# Altium PCB Awtrix Finally.pcbdoc (part 1 of 4)
Units mil, origin at the board's own origin, x right, y up, seen from the top; angles counter-clockwise.
Board outline 8820 x 2812 mil, 2 copper layers (Top Layer, Bottom Layer); 513 components, 259 nets, 1543 pads, 743 vias.
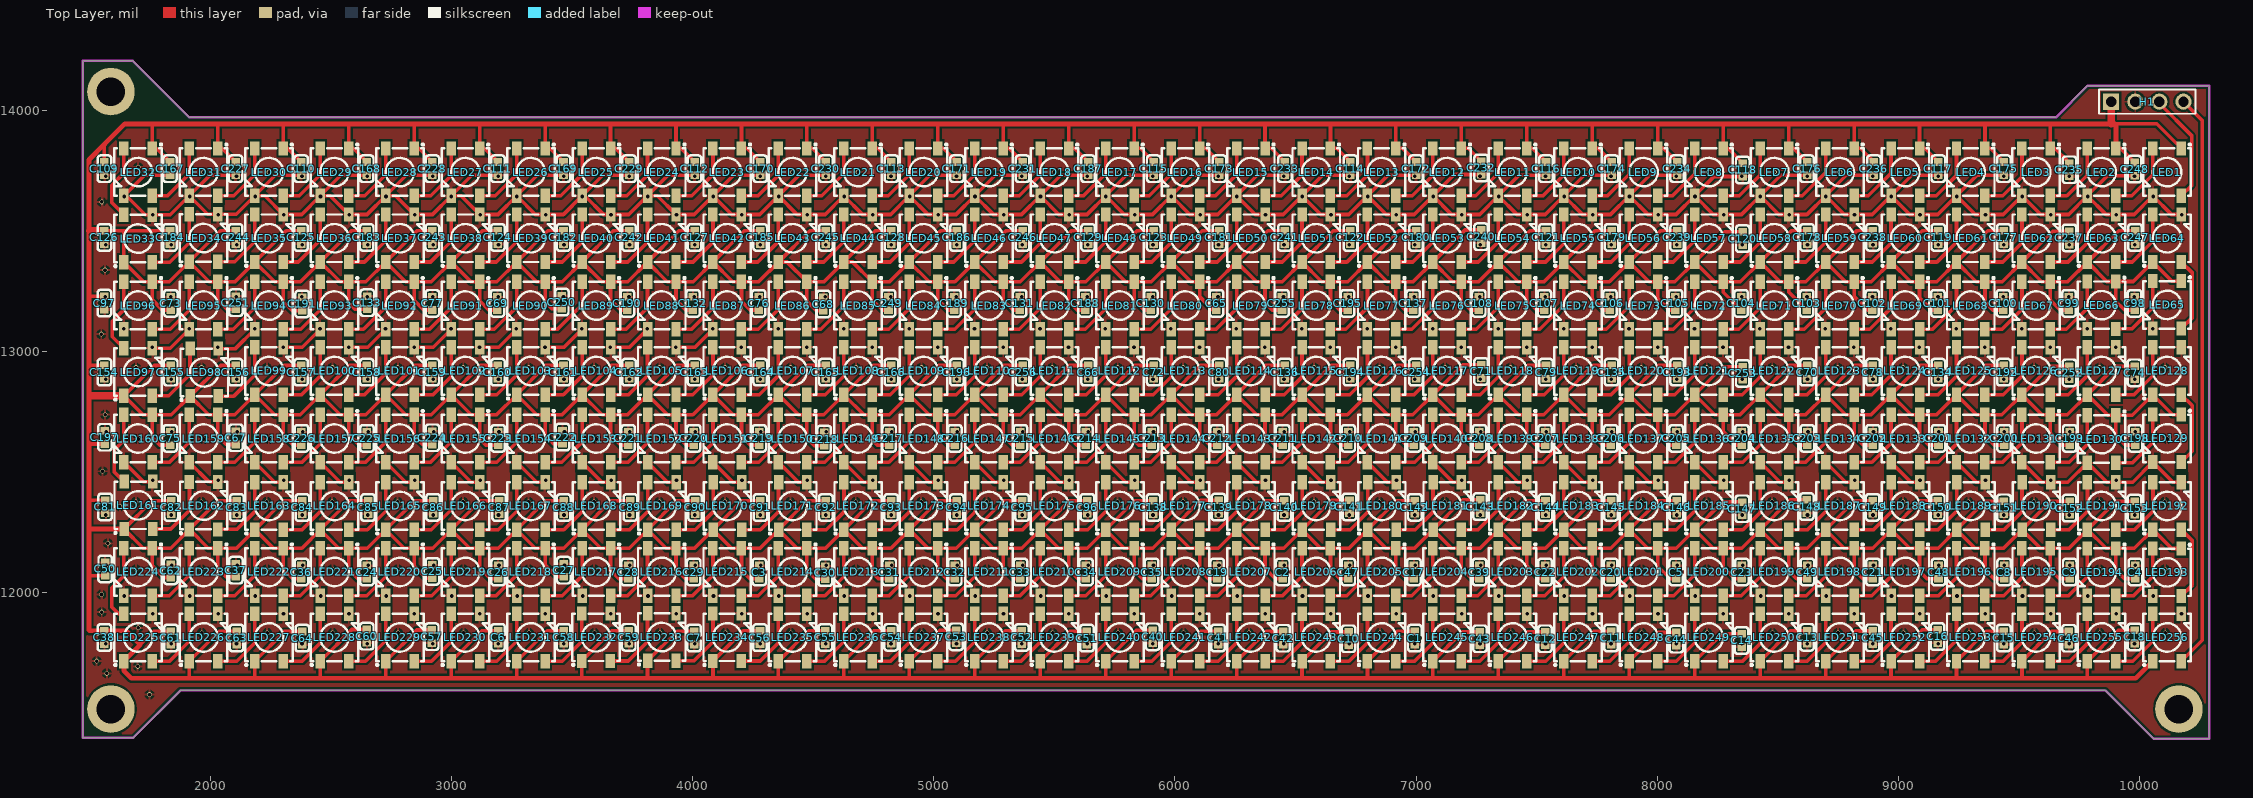
[diagram p0: Top Layer view]
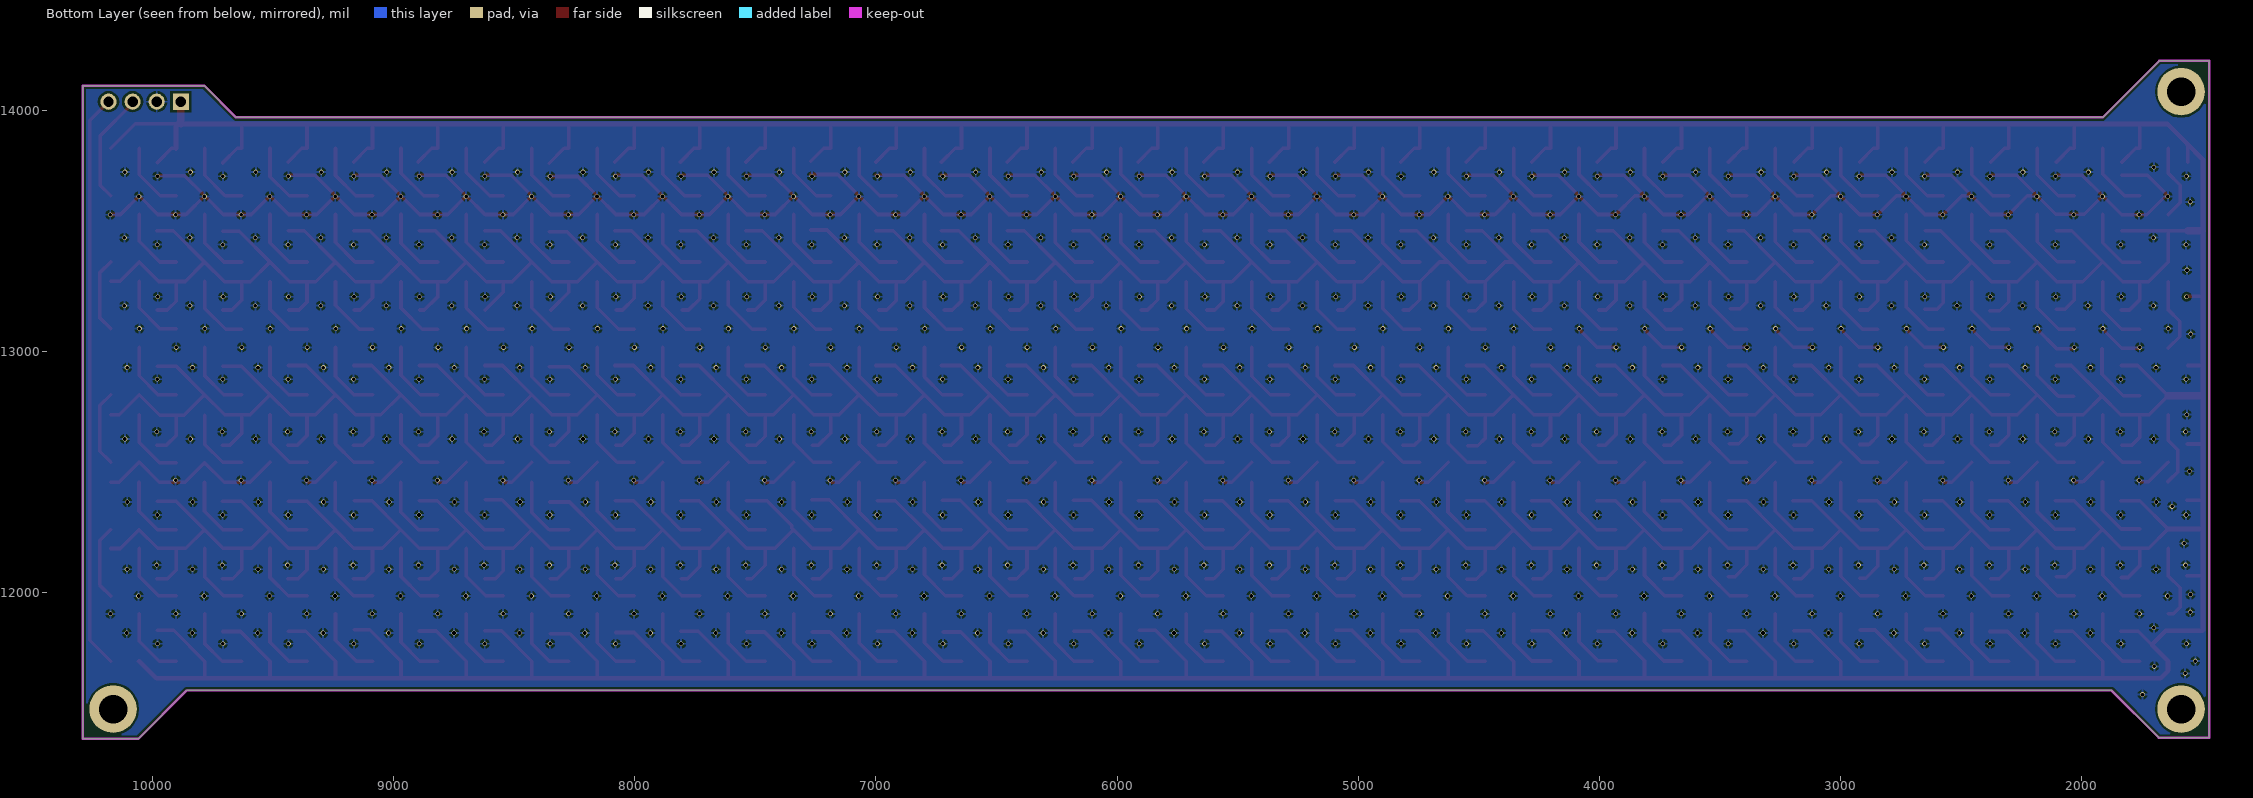
[diagram p1: Bottom Layer view, seen from below]

## Layer stack, top to bottom
Top Solder: solder mask 0.4, Solder Resist, Dk 3.5
Top Layer: signal copper 1.4
Dielectric1: dielectric 12.6, FR-4, Dk 4.8
Bottom Layer: signal copper 1.4
Bottom Solder: solder mask 0.4, Solder Resist, Dk 3.5

## Board outline
1470,11399 1470,14207 1677,14207 1912,13972 9654,13972 9786,14104 10290,14104 10290,11395 10059,11395 9859,11595 1875,11595 1679,11399

## Design rules (kind name [scope] priority, off if disabled: settings)
Clearance Clearance_3 [InNamedPolygon('Top Layer-No Net')] p1: gap=10 ignorepadtopadclearanceinfootprint=FALSE except(0: Arc-Hole Track-Hole SMDPad-Hole THPad-Hole Via-Hole Fill-Hole Poly-Hole Region-Hole Text-Hole)
Clearance Clearance_2 [InNamedPolygon('Top Layer-No Net')] p2: gap=10 ignorepadtopadclearanceinfootprint=FALSE except(0: Arc-Hole Track-Hole SMDPad-Hole THPad-Hole Via-Hole Fill-Hole Poly-Hole Region-Hole Text-Hole)
Clearance Clearance_1 [InNamedPolygon('Top Layer-No Net')] p3: gap=20 ignorepadtopadclearanceinfootprint=FALSE
Clearance [All] p4 off: gap=6 ignorepadtopadclearanceinfootprint=FALSE
DiffPairsRouting [All] p1: maxlimit=10 minlimit=10 mostfreqgap=10 toplayer_minwidth=15 toplayer_maxwidth=15 toplayer_prefwidth=15 bottomlayer_minwidth=15 bottomlayer_maxwidth=15 bottomlayer_prefwidth=15 substack1={9DCB3A66-A2ED-46C3-AF7E-1C9C7828DB16} toplayer_{9dcb3a66-a2ed-46c3-af7e-1c9c7828db16}_minwidth=15 toplayer_{9dcb3a66-a2ed-46c3-af7e-1c9c7828db16}_maxwidth=15 toplayer_{9dcb3a66-a2ed-46c3-af7e-1c9c7828db16}_prefwidth=15 bottomlayer_{9dcb3a66-a2ed-46c3-af7e-1c9c7828db16}_minwidth=15 bottomlayer_{9dcb3a66-a2ed-46c3-af7e-1c9c7828db16}_maxwidth=15 bottomlayer_{9dcb3a66-a2ed-46c3-af7e-1c9c7828db16}_prefwidth=15 substack2={7CB1ADBF-FCB9-4D81-AEE6-A38A94ABE13F} toplayer_{7cb1adbf-fcb9-4d81-aee6-a38a94abe13f}_minwidth=15 toplayer_{7cb1adbf-fcb9-4d81-aee6-a38a94abe13f}_maxwidth=15 toplayer_{7cb1adbf-fcb9-4d81-aee6-a38a94abe13f}_prefwidth=15 bottomlayer_{7cb1adbf-fcb9-4d81-aee6-a38a94abe13f}_minwidth=15 bottomlayer_{7cb1adbf-fcb9-4d81-aee6-a38a94abe13f}_maxwidth=15 bottomlayer_{7cb1adbf-fcb9-4d81-aee6-a38a94abe13f}_prefwidth=15 substack3={DA0BA345-2DA5-458A-ACEA-8A78981C34EA} toplayer_{da0ba345-2da5-458a-acea-8a78981c34ea}_minwidth=15 toplayer_{da0ba345-2da5-458a-acea-8a78981c34ea}_maxwidth=15 toplayer_{da0ba345-2da5-458a-acea-8a78981c34ea}_prefwidth=15 bottomlayer_{da0ba345-2da5-458a-acea-8a78981c34ea}_minwidth=15 bottomlayer_{da0ba345-2da5-458a-acea-8a78981c34ea}_maxwidth=15 bottomlayer_{da0ba345-2da5-458a-acea-8a78981c34ea}_prefwidth=15 substack4={AAEF50FA-F602-4D6B-89CB-EBC685EF44E8} toplayer_{aaef50fa-f602-4d6b-89cb-ebc685ef44e8}_minwidth=15 toplayer_{aaef50fa-f602-4d6b-89cb-ebc685ef44e8}_maxwidth=15 toplayer_{aaef50fa-f602-4d6b-89cb-ebc685ef44e8}_prefwidth=15 bottomlayer_{aaef50fa-f602-4d6b-89cb-ebc685ef44e8}_minwidth=15 bottomlayer_{aaef50fa-f602-4d6b-89cb-ebc685ef44e8}_maxwidth=15 bottomlayer_{aaef50fa-f602-4d6b-89cb-ebc685ef44e8}_prefwidth=15 maxuncoupledlength=500
HoleSize [All] p1: absolutevalues=TRUE maxlimit=10000 minlimit=1 maxpercent=80.000 minpercent=20.000
MinimumSolderMaskSliver [All] p1: minsoldermaskwidth=6
PolygonConnect [All] p1: connectstyle=Relief reliefconductorwidth=10 reliefentries=4 polygonreliefangle="90 Angle" airgapwidth=10
RoutingVias [All] p1: holewidth=12 width=22 viastyle="Through Hole" minholewidth=12 minwidth=22 maxholewidth=12 maxwidth=22
SilkToSilkClearance [All] p1: silktosilkclearance=0
SilkToSolderMaskClearance [IsPad] p1: minsilkscreentomaskgap=0 clearancetoexposedcopper=TRUE
SolderMaskExpansion [All] p1: expansion=4 istentingtop=FALSE
Width [All] p1: maxlimit=100 minlimit=10 preferedwidth=15 substack1={9DCB3A66-A2ED-46C3-AF7E-1C9C7828DB16} toplayer_{9dcb3a66-a2ed-46c3-af7e-1c9c7828db16}_maxwidth=50 bottomlayer_{9dcb3a66-a2ed-46c3-af7e-1c9c7828db16}_maxwidth=50 substack2={7CB1ADBF-FCB9-4D81-AEE6-A38A94ABE13F} toplayer_{7cb1adbf-fcb9-4d81-aee6-a38a94abe13f}_maxwidth=50 bottomlayer_{7cb1adbf-fcb9-4d81-aee6-a38a94abe13f}_maxwidth=50 substack3={DA0BA345-2DA5-458A-ACEA-8A78981C34EA} toplayer_{da0ba345-2da5-458a-acea-8a78981c34ea}_maxwidth=50 bottomlayer_{da0ba345-2da5-458a-acea-8a78981c34ea}_maxwidth=50 substack4={AAEF50FA-F602-4D6B-89CB-EBC685EF44E8} toplayer_{aaef50fa-f602-4d6b-89cb-ebc685ef44e8}_maxwidth=50 bottomlayer_{aaef50fa-f602-4d6b-89cb-ebc685ef44e8}_maxwidth=50
25 further rules are at their usual default settings.

## Components (designator, comment, footprint, x,y, rotation, side; value= is the part's Value field where it differs from the comment)
C1 "10uF" C0603 6995,11812.44 r90 top
C2 "10uF" C0603 6446.98,12086.26 r270 top
C3 "10uF" C0603 4275.97,12086.26 r270 top
C4 "10uF" C0603 9983,12086.26 r270 top
C5 "10uF" C0603 8078.99,12086.26 r270 top
C6 "10uF" C0603 3192.76,11815.61 r90 top
C7 "10uF" C0603 4005.75,11813.32 r90 top
C8 "10uF" C0603 9439,12086.26 r270 top
C9 "10uF" C0603 9711,12086.26 r270 top
C10 "10uF" C0603 6720,11810 r90 top
C11 "10uF" C0603 7809,11813 r90 top
C12 "10uF" C0603 7535,11810 r90 top
C13 "10uF" C0603 8622,11816 r90 top
C14 "10uF" C0603 8350,11802.56 r90 top
C15 "10uF" C0603 9438,11813 r90 top
C16 "10uF" C0603 9163,11819 r90 top
C17 "10uF" C0603 6990.98,12086.26 r270 top
C18 "10uF" C0603 9980,11817.44 r90 top
C19 "10uF" C0603 6174.98,12086.26 r270 top
C20 "10uF" C0603 7806.99,12086.26 r270 top
C21 "10uF" C0603 8894.99,12086.26 r270 top
C22 "10uF" C0603 7534.99,12086.26 r270 top
C23 "10uF" C0603 8350.99,12086.26 r270 top
C24 "10uF" C0603 2648.96,12086.26 r270 top
C25 "10uF" C0603 2920,12088.56 r270 top
C26 "10uF" C0603 3192.96,12086.26 r270 top
C27 "10uF" C0603 3465,12093.56 r270 top
C28 "10uF" C0603 3731.97,12086.26 r270 top
C29 "10uF" C0603 4003.97,12086.26 r270 top
C30 "10uF" C0603 4550,12083.44 r270 top
C31 "10uF" C0603 4814.97,12086.26 r270 top
C32 "10uF" C0603 5086.97,12086.26 r270 top
C33 "10uF" C0603 5358.97,12086.26 r270 top
C34 "10uF" C0603 5630.98,12086.26 r270 top
C35 "10uF" C0603 5902.98,12086.26 r270 top
C36 "10uF" C0603 2376.96,12086.26 r270 top
C37 "10uF" C0603 2105,12093.56 r270 top
C38 "10uF" C0603 1560,11815 r90 top
C39 "10uF" C0603 7262.98,12086.26 r270 top
C40 "10uF" C0603 5908,11818 r90 top
C41 "10uF" C0603 6179,11813 r90 top
C42 "10uF" C0603 6449,11812 r90 top
C43 "10uF" C0603 7265,11810 r90 top
C44 "10uF" C0603 8080,11808 r90 top
C45 "10uF" C0603 8894,11814 r90 top
C46 "10uF" C0603 9708,11812 r90 top
C47 "10uF" C0603 6718.98,12086.26 r270 top
C48 "10uF" C0603 9166.99,12086.26 r270 top
C49 "10uF" C0603 8622.99,12086.26 r270 top
C50 "10uF" C0603 1563,12099 r270 top
C51 "10uF" C0603 5635,11812.44 r90 top
C52 "10uF" C0603 5365,11815 r90 top
C53 "10uF" C0603 5093,11818 r90 top
C54 "10uF" C0603 4823,11816 r90 top
C55 "10uF" C0603 4550,11815 r90 top
C56 "10uF" C0603 4279,11814.44 r90 top
C57 "10uF" C0603 2917.75,11818.32 r90 top
C58 "10uF" C0603 3464.76,11815.61 r90 top
C59 "10uF" C0603 3735,11816 r90 top
C60 "10uF" C0603 2648,11820.44 r90 top
C61 "10uF" C0603 1836,11813 r90 top
C62 "10uF" C0603 1835,12091 r270 top
C63 "10uF" C0603 2108,11813 r90 top
C64 "10uF" C0603 2381,11812.3 r90 top
C65 "10uF" C0603 6171.98,13200.44 r270 top
C66 "10uF" C0603 5640.02,12915.56 r90 top
C67 "10uF" C0603 2105,12642.96 r270 top
C68 "10uF" C0603 4542,13197.41 r270 top
C69 "10uF" C0603 3189.97,13200.44 r270 top
C70 "10uF" C0603 8622.04,12915.56 r90 top
C71 "10uF" C0603 7270,12918.59 r90 top
C72 "10uF" C0603 5912.02,12915.56 r90 top
C73 "10uF" C0603 1835,13200.44 r270 top
C74 "10uF" C0603 9980,12913 r90 top
C75 "10uF" C0603 1832.96,12640.41 r270 top
C76 "10uF" C0603 4272.97,13200.44 r270 top
C77 "10uF" C0603 2920,13200.56 r270 top
C78 "10uF" C0603 8895,12915.56 r90 top
C79 "10uF" C0603 7539.03,12915.56 r90 top
C80 "10uF" C0603 6184.02,12915.56 r90 top
C81 "10uF" C0603 1563,12357 r90 top
C82 "10uF" C0603 1837.4,12354.09 r90 top
C83 "10uF" C0603 2109.4,12354.09 r90 top
C84 "10uF" C0603 2381.41,12354.09 r90 top
C85 "10uF" C0603 2653.41,12354.09 r90 top
C86 "10uF" C0603 2923,12355 r90 top
C87 "10uF" C0603 3197.41,12354.09 r90 top
C88 "10uF" C0603 3465,12354 r90 top
C89 "10uF" C0603 3741.41,12354.09 r90 top
C90 "10uF" C0603 4010,12354 r90 top
C91 "10uF" C0603 4281,12354 r90 top
C92 "10uF" C0603 4552,12354 r90 top
C93 "10uF" C0603 4823,12354 r90 top
C94 "10uF" C0603 5095,12354 r90 top
C95 "10uF" C0603 5366,12354 r90 top
C96 "10uF" C0603 5637,12355 r90 top
C97 "10uF" C0603 1560,13202 r90 top
C98 "10uF" C0603 9980,13200.44 r270 top
C99 "10uF" C0603 9708,13200.44 r270 top
C100 "10uF" C0603 9436,13200.44 r270 top
C101 "10uF" C0603 9164,13200.44 r270 top
C102 "10uF" C0603 8891.99,13200.44 r270 top
C103 "10uF" C0603 8619.99,13200.44 r270 top
C104 "10uF" C0603 8347.99,13200.44 r270 top
C105 "10uF" C0603 8075.99,13200.44 r270 top
C106 "10uF" C0603 7803.99,13200.44 r270 top
C107 "10uF" C0603 7531.99,13200.44 r270 top
C108 "10uF" C0603 7259.99,13200.44 r270 top
C109 "10uF" C0603 1560,13759.41 r90 top
C110 "10uF" C0603 2376,13759.41 r90 top
C111 "10uF" C0603 3192.01,13759.41 r90 top
C112 "10uF" C0603 4008.01,13759.41 r90 top
C113 "10uF" C0603 4824.02,13759.41 r90 top
C114 "10uF" C0603 6728.03,13759.41 r90 top
C115 "10uF" C0603 5912.02,13759.41 r90 top
C116 "10uF" C0603 7539.03,13759.41 r90 top
C117 "10uF" C0603 9166.04,13759.41 r90 top
C118 "10uF" C0603 8355.03,13754.41 r90 top
C119 "10uF" C0603 9166.04,13474.41 r90 top
C120 "10uF" C0603 8355.03,13469.41 r90 top
C121 "10uF" C0603 7539.03,13474.41 r90 top
C122 "10uF" C0603 6728.03,13474.41 r90 top
C123 "10uF" C0603 5912.02,13474.41 r90 top
C124 "10uF" C0603 3192.01,13474.41 r90 top
C125 "10uF" C0603 2376,13474.41 r90 top
C126 "10uF" C0603 1560,13474.41 r90 top
C127 "10uF" C0603 4008.01,13474.41 r90 top
C128 "10uF" C0603 4824.02,13474.41 r90 top
C129 "10uF" C0603 5640.02,13474.41 r90 top
C130 "10uF" C0603 5899.98,13200.44 r270 top
C131 "10uF" C0603 5355.98,13200.44 r270 top
C132 "10uF" C0603 4000.97,13200.44 r270 top
C133 "10uF" C0603 2650,13203 r270 top
C134 "10uF" C0603 9166.04,12915.56 r90 top
C135 "10uF" C0603 7811.03,12915.56 r90 top
C136 "10uF" C0603 6456.03,12915.56 r90 top
C137 "10uF" C0603 6987.98,13200.44 r270 top
C138 "10uF" C0603 5911,12354 r90 top
C139 "10uF" C0603 6181,12356 r90 top
C140 "10uF" C0603 6454,12354 r90 top
C141 "10uF" C0603 6724,12357 r90 top
C142 "10uF" C0603 6995,12355 r90 top
C143 "10uF" C0603 7266,12358 r90 top
C144 "10uF" C0603 7537,12354 r90 top
C145 "10uF" C0603 7809,12355 r90 top
C146 "10uF" C0603 8081,12355 r90 top
C147 "10uF" C0603 8353,12349 r90 top
C148 "10uF" C0603 8621,12358 r90 top
C149 "10uF" C0603 8894,12355 r90 top
C150 "10uF" C0603 9164,12354 r90 top
C151 "10uF" C0603 9438.04,12353 r90 top
C152 "10uF" C0603 9710.4,12351.65 r90 top
C153 "10uF" C0603 9980.4,12351.65 r90 top
C154 "10uF" C0603 1560,12915.56 r90 top
C155 "10uF" C0603 1835,12915.44 r90 top
C156 "10uF" C0603 2104,12915.56 r90 top
C157 "10uF" C0603 2376,12915.56 r90 top
C158 "10uF" C0603 2648.01,12915.56 r90 top
C159 "10uF" C0603 2920.01,12915.56 r90 top
C160 "10uF" C0603 3192.01,12915.56 r90 top
C161 "10uF" C0603 3464.01,12915.56 r90 top
C162 "10uF" C0603 3736.01,12915.56 r90 top
C163 "10uF" C0603 4008.01,12915.56 r90 top
C164 "10uF" C0603 4280.01,12915.56 r90 top
C165 "10uF" C0603 4552.02,12915.56 r90 top
C166 "10uF" C0603 4824.02,12915.56 r90 top
C167 "10uF" C0603 1832,13759.41 r90 top
C168 "10uF" C0603 2648.01,13759.41 r90 top
C169 "10uF" C0603 3464.01,13759.41 r90 top
C170 "10uF" C0603 4280.01,13759.41 r90 top
C171 "10uF" C0603 5096.02,13759.41 r90 top
C172 "10uF" C0603 7000.03,13759.41 r90 top
C173 "10uF" C0603 6184.02,13759.41 r90 top
C174 "10uF" C0603 7811.03,13759.41 r90 top
C175 "10uF" C0603 9438.04,13759.41 r90 top
C176 "10uF" C0603 8622.04,13759.41 r90 top
C177 "10uF" C0603 9438.04,13474.41 r90 top
C178 "10uF" C0603 8622.04,13474.41 r90 top
C179 "10uF" C0603 7811.03,13474.41 r90 top
C180 "10uF" C0603 7000.03,13474.41 r90 top
C181 "10uF" C0603 6184.02,13474.41 r90 top
C182 "10uF" C0603 3464.01,13474.41 r90 top
C183 "10uF" C0603 2648.01,13474.41 r90 top
C184 "10uF" C0603 1832,13474.41 r90 top
C185 "10uF" C0603 4280.01,13474.41 r90 top
C186 "10uF" C0603 5096.02,13474.41 r90 top
C187 "10uF" C0603 5640.02,13759.41 r90 top
C188 "10uF" C0603 5627.98,13200.44 r270 top
C189 "10uF" C0603 5083.97,13200.44 r270 top
C190 "10uF" C0603 3728.97,13200.44 r270 top
C191 "10uF" C0603 2380,13198 r270 top
C192 "10uF" C0603 9438.04,12915.56 r90 top
C193 "10uF" C0603 8083.03,12915.56 r90 top
C194 "10uF" C0603 6728.03,12915.56 r90 top
C195 "10uF" C0603 6715.98,13200.44 r270 top
C196 "10uF" C0603 5096.02,12915.56 r90 top
C197 "10uF" C0603 1562,12645 r270 top
C198 "10uF" C0603 9983,12640.41 r270 top
C199 "10uF" C0603 9711,12640.41 r270 top
C200 "10uF" C0603 9439,12640.41 r270 top
C201 "10uF" C0603 9166.99,12640.41 r270 top
C202 "10uF" C0603 8894.99,12640.41 r270 top
C203 "10uF" C0603 8622.99,12640.41 r270 top
C204 "10uF" C0603 8350.99,12640.41 r270 top
C205 "10uF" C0603 8078.99,12640.41 r270 top
C206 "10uF" C0603 7806.99,12640.41 r270 top
C207 "10uF" C0603 7534.99,12640.41 r270 top
C208 "10uF" C0603 7262.98,12640.41 r270 top
C209 "10uF" C0603 6990.98,12640.41 r270 top
C210 "10uF" C0603 6718.98,12640.41 r270 top
C211 "10uF" C0603 6446.98,12640.41 r270 top
C212 "10uF" C0603 6174.98,12640.41 r270 top
C213 "10uF" C0603 5902.98,12640.41 r270 top
C214 "10uF" C0603 5630.98,12640.41 r270 top
C215 "10uF" C0603 5358.97,12640.41 r270 top
C216 "10uF" C0603 5086.97,12640.41 r270 top
C217 "10uF" C0603 4814.97,12640.41 r270 top
C218 "10uF" C0603 4545,12637.37 r270 top
C219 "10uF" C0603 4275.97,12640.41 r270 top
C220 "10uF" C0603 4003.97,12640.41 r270 top
C221 "10uF" C0603 3731.97,12640.41 r270 top
C222 "10uF" C0603 3459.97,12645.41 r270 top
C223 "10uF" C0603 3192.96,12640.41 r270 top
C224 "10uF" C0603 2920,12642.96 r270 top
C225 "10uF" C0603 2648.96,12640.41 r270 top
C226 "10uF" C0603 2376.96,12640.41 r270 top
C227 "10uF" C0603 2104,13759.41 r90 top
C228 "10uF" C0603 2920.01,13759.41 r90 top
C229 "10uF" C0603 3736.01,13759.41 r90 top
C230 "10uF" C0603 4552.02,13759.41 r90 top
C231 "10uF" C0603 5368.02,13759.41 r90 top
C232 "10uF" C0603 7270,13762.44 r90 top
C233 "10uF" C0603 6456.03,13759.41 r90 top
C234 "10uF" C0603 8083.03,13759.41 r90 top
C235 "10uF" C0603 9710,13755 r90 top
C236 "10uF" C0603 8899.04,13759.41 r90 top
C237 "10uF" C0603 9710,13472.44 r90 top
C238 "10uF" C0603 8895,13475 r90 top
C239 "10uF" C0603 8083.03,13474.41 r90 top
C240 "10uF" C0603 7270,13477.44 r90 top
C241 "10uF" C0603 6456.03,13474.41 r90 top
C242 "10uF" C0603 3736.01,13474.41 r90 top
C243 "10uF" C0603 2920.01,13474.41 r90 top
C244 "10uF" C0603 2104,13474.41 r90 top
C245 "10uF" C0603 4552.02,13474.41 r90 top
C246 "10uF" C0603 5368.02,13474.41 r90 top
C247 "10uF" C0603 9982.04,13474.41 r90 top
C248 "10uF" C0603 9980,13757.44 r90 top
C249 "10uF" C0603 4811.97,13200.44 r270 top
C250 "10uF" C0603 3456.97,13205.44 r270 top
C251 "10uF" C0603 2105,13203 r270 top
C252 "10uF" C0603 9710,12913 r90 top
C253 "10uF" C0603 8355.03,12910.56 r90 top
C254 "10uF" C0603 7000.03,12915.56 r90 top
C255 "10uF" C0603 6443.98,13200.44 r270 top
C256 "10uF" C0603 5368.02,12915.56 r90 top
H1 "220S-1*4P H=8.5MM Ytype Gold-plated" HDR-TH_4P-P2.54-V 10033,14037 r0 top
LED1 "WS2812B" LED-SMD_4P-L5.0-W5.0-TL 10114.99,13745 r270 top
LED2 "WS2812B" LED-SMD_4P-L5.0-W5.0-TL 9843.54,13745 r270 top
LED3 "WS2812B" LED-SMD_4P-L5.0-W5.0-TL 9572.09,13745 r270 top
LED4 "WS2812B" LED-SMD_4P-L5.0-W5.0-TL 9300.64,13745 r270 top
LED5 "WS2812B" LED-SMD_4P-L5.0-W5.0-TL 9029.18,13745 r270 top
LED6 "WS2812B" LED-SMD_4P-L5.0-W5.0-TL 8757.73,13745 r270 top
LED7 "WS2812B" LED-SMD_4P-L5.0-W5.0-TL 8486.28,13745 r270 top
LED8 "WS2812B" LED-SMD_4P-L5.0-W5.0-TL 8214.83,13745 r270 top
LED9 "WS2812B" LED-SMD_4P-L5.0-W5.0-TL 7943.38,13745 r270 top
LED10 "WS2812B" LED-SMD_4P-L5.0-W5.0-TL 7671.93,13745 r270 top
LED11 "WS2812B" LED-SMD_4P-L5.0-W5.0-TL 7400.47,13745 r270 top
LED12 "WS2812B" LED-SMD_4P-L5.0-W5.0-TL 7129.02,13745 r270 top
LED13 "WS2812B" LED-SMD_4P-L5.0-W5.0-TL 6857.57,13745 r270 top
LED14 "WS2812B" LED-SMD_4P-L5.0-W5.0-TL 6586.12,13745 r270 top
LED15 "WS2812B" LED-SMD_4P-L5.0-W5.0-TL 6314.67,13745 r270 top
LED16 "WS2812B" LED-SMD_4P-L5.0-W5.0-TL 6043.22,13745 r270 top
LED17 "WS2812B" LED-SMD_4P-L5.0-W5.0-TL 5771.77,13745 r270 top
LED18 "WS2812B" LED-SMD_4P-L5.0-W5.0-TL 5500.31,13745 r270 top
LED19 "WS2812B" LED-SMD_4P-L5.0-W5.0-TL 5228.86,13745 r270 top
LED20 "WS2812B" LED-SMD_4P-L5.0-W5.0-TL 4957.41,13745 r270 top
LED21 "WS2812B" LED-SMD_4P-L5.0-W5.0-TL 4685.96,13745 r270 top
LED22 "WS2812B" LED-SMD_4P-L5.0-W5.0-TL 4414.51,13745 r270 top
LED23 "WS2812B" LED-SMD_4P-L5.0-W5.0-TL 4143.06,13745 r270 top
LED24 "WS2812B" LED-SMD_4P-L5.0-W5.0-TL 3871.61,13745 r270 top
LED25 "WS2812B" LED-SMD_4P-L5.0-W5.0-TL 3600.15,13745 r270 top
LED26 "WS2812B" LED-SMD_4P-L5.0-W5.0-TL 3328.7,13745 r270 top
LED27 "WS2812B" LED-SMD_4P-L5.0-W5.0-TL 3057.25,13745 r270 top
LED28 "WS2812B" LED-SMD_4P-L5.0-W5.0-TL 2785.8,13745 r270 top
LED29 "WS2812B" LED-SMD_4P-L5.0-W5.0-TL 2514.35,13745 r270 top
LED30 "WS2812B" LED-SMD_4P-L5.0-W5.0-TL 2242.9,13745 r270 top
LED31 "WS2812B" LED-SMD_4P-L5.0-W5.0-TL 1971.44,13745 r270 top
LED32 "WS2812B" LED-SMD_4P-L5.0-W5.0-TL 1699.99,13745 r270 top
LED33 "WS2812B" LED-SMD_4P-L5.0-W5.0-TL 1700,13469.29 r90 top
LED34 "WS2812B" LED-SMD_4P-L5.0-W5.0-TL 1970.95,13471.58 r90 top
LED35 "WS2812B" LED-SMD_4P-L5.0-W5.0-TL 2242.9,13470.72 r90 top
LED36 "WS2812B" LED-SMD_4P-L5.0-W5.0-TL 2514.35,13470.72 r90 top
LED37 "WS2812B" LED-SMD_4P-L5.0-W5.0-TL 2785.81,13470.72 r90 top
LED38 "WS2812B" LED-SMD_4P-L5.0-W5.0-TL 3057.26,13470.72 r90 top
LED39 "WS2812B" LED-SMD_4P-L5.0-W5.0-TL 3328.71,13470.72 r90 top
LED40 "WS2812B" LED-SMD_4P-L5.0-W5.0-TL 3600.16,13470.72 r90 top
LED41 "WS2812B" LED-SMD_4P-L5.0-W5.0-TL 3871.61,13470.72 r90 top
LED42 "WS2812B" LED-SMD_4P-L5.0-W5.0-TL 4143.06,13470.72 r90 top
LED43 "WS2812B" LED-SMD_4P-L5.0-W5.0-TL 4414.52,13470.72 r90 top
LED44 "WS2812B" LED-SMD_4P-L5.0-W5.0-TL 4685.97,13470.72 r90 top
LED45 "WS2812B" LED-SMD_4P-L5.0-W5.0-TL 4957.42,13470.72 r90 top
LED46 "WS2812B" LED-SMD_4P-L5.0-W5.0-TL 5228.87,13470.72 r90 top
LED47 "WS2812B" LED-SMD_4P-L5.0-W5.0-TL 5500.32,13470.72 r90 top
LED48 "WS2812B" LED-SMD_4P-L5.0-W5.0-TL 5771.77,13470.72 r90 top
LED49 "WS2812B" LED-SMD_4P-L5.0-W5.0-TL 6043.22,13470.72 r90 top
LED50 "WS2812B" LED-SMD_4P-L5.0-W5.0-TL 6314.68,13470.72 r90 top
LED51 "WS2812B" LED-SMD_4P-L5.0-W5.0-TL 6586.13,13470.72 r90 top
LED52 "WS2812B" LED-SMD_4P-L5.0-W5.0-TL 6857.58,13470.72 r90 top
LED53 "WS2812B" LED-SMD_4P-L5.0-W5.0-TL 7129.03,13470.72 r90 top
LED54 "WS2812B" LED-SMD_4P-L5.0-W5.0-TL 7400.48,13470.72 r90 top
LED55 "WS2812B" LED-SMD_4P-L5.0-W5.0-TL 7671.93,13470.72 r90 top
LED56 "WS2812B" LED-SMD_4P-L5.0-W5.0-TL 7943.38,13470.72 r90 top
LED57 "WS2812B" LED-SMD_4P-L5.0-W5.0-TL 8214.84,13470.72 r90 top
LED58 "WS2812B" LED-SMD_4P-L5.0-W5.0-TL 8486.29,13470.72 r90 top
LED59 "WS2812B" LED-SMD_4P-L5.0-W5.0-TL 8757.74,13470.72 r90 top
LED60 "WS2812B" LED-SMD_4P-L5.0-W5.0-TL 9029.19,13470.72 r90 top
LED61 "WS2812B" LED-SMD_4P-L5.0-W5.0-TL 9300.64,13470.72 r90 top
LED62 "WS2812B" LED-SMD_4P-L5.0-W5.0-TL 9572.09,13470.72 r90 top
LED63 "WS2812B" LED-SMD_4P-L5.0-W5.0-TL 9843.55,13470.72 r90 top
LED64 "WS2812B" LED-SMD_4P-L5.0-W5.0-TL 10115,13470.72 r90 top
LED65 "WS2812B" LED-SMD_4P-L5.0-W5.0-TL 10115,13194.43 r270 top
LED66 "WS2812B" LED-SMD_4P-L5.0-W5.0-TL 9843.55,13193 r270 top
LED67 "WS2812B" LED-SMD_4P-L5.0-W5.0-TL 9572.1,13191.57 r270 top
LED68 "WS2812B" LED-SMD_4P-L5.0-W5.0-TL 9300.65,13191.57 r270 top
LED69 "WS2812B" LED-SMD_4P-L5.0-W5.0-TL 9029.19,13191.57 r270 top
LED70 "WS2812B" LED-SMD_4P-L5.0-W5.0-TL 8757.74,13191.57 r270 top
LED71 "WS2812B" LED-SMD_4P-L5.0-W5.0-TL 8486.29,13191.57 r270 top
LED72 "WS2812B" LED-SMD_4P-L5.0-W5.0-TL 8214.84,13191.57 r270 top
LED73 "WS2812B" LED-SMD_4P-L5.0-W5.0-TL 7943.39,13191.57 r270 top
LED74 "WS2812B" LED-SMD_4P-L5.0-W5.0-TL 7671.94,13191.57 r270 top
LED75 "WS2812B" LED-SMD_4P-L5.0-W5.0-TL 7400.48,13191.57 r270 top
LED76 "WS2812B" LED-SMD_4P-L5.0-W5.0-TL 7129.03,13191.57 r270 top
LED77 "WS2812B" LED-SMD_4P-L5.0-W5.0-TL 6857.58,13191.57 r270 top
LED78 "WS2812B" LED-SMD_4P-L5.0-W5.0-TL 6586.13,13191.57 r270 top
LED79 "WS2812B" LED-SMD_4P-L5.0-W5.0-TL 6314.68,13191.57 r270 top
LED80 "WS2812B" LED-SMD_4P-L5.0-W5.0-TL 6043.23,13191.57 r270 top
LED81 "WS2812B" LED-SMD_4P-L5.0-W5.0-TL 5771.78,13191.57 r270 top
LED82 "WS2812B" LED-SMD_4P-L5.0-W5.0-TL 5500.32,13191.57 r270 top
LED83 "WS2812B" LED-SMD_4P-L5.0-W5.0-TL 5228.87,13191.57 r270 top
LED84 "WS2812B" LED-SMD_4P-L5.0-W5.0-TL 4957.42,13191.57 r270 top
LED85 "WS2812B" LED-SMD_4P-L5.0-W5.0-TL 4685.97,13191.57 r270 top
LED86 "WS2812B" LED-SMD_4P-L5.0-W5.0-TL 4414.52,13191.57 r270 top
LED87 "WS2812B" LED-SMD_4P-L5.0-W5.0-TL 4143.07,13191.57 r270 top
LED88 "WS2812B" LED-SMD_4P-L5.0-W5.0-TL 3871.62,13191.57 r270 top
LED89 "WS2812B" LED-SMD_4P-L5.0-W5.0-TL 3600.16,13191.57 r270 top
LED90 "WS2812B" LED-SMD_4P-L5.0-W5.0-TL 3328.71,13191.57 r270 top
LED91 "WS2812B" LED-SMD_4P-L5.0-W5.0-TL 3057.26,13191.57 r270 top
LED92 "WS2812B" LED-SMD_4P-L5.0-W5.0-TL 2785.81,13191.57 r270 top
LED93 "WS2812B" LED-SMD_4P-L5.0-W5.0-TL 2514.36,13191.57 r270 top
LED94 "WS2812B" LED-SMD_4P-L5.0-W5.0-TL 2242.91,13191.57 r270 top
LED95 "WS2812B" LED-SMD_4P-L5.0-W5.0-TL 1971.45,13191.57 r270 top
LED96 "WS2812B" LED-SMD_4P-L5.0-W5.0-TL 1700,13191.57 r270 top
LED97 "WS2812B" LED-SMD_4P-L5.0-W5.0-TL 1700,12915.86 r90 top
LED98 "WS2812B" LED-SMD_4P-L5.0-W5.0-TL 1974.05,12914.58 r90 top
LED99 "WS2812B" LED-SMD_4P-L5.0-W5.0-TL 2242.9,12920.14 r90 top
LED100 "WS2812B" LED-SMD_4P-L5.0-W5.0-TL 2514.35,12920.14 r90 top
LED101 "WS2812B" LED-SMD_4P-L5.0-W5.0-TL 2785.81,12920.14 r90 top
LED102 "WS2812B" LED-SMD_4P-L5.0-W5.0-TL 3057.26,12920.14 r90 top
LED103 "WS2812B" LED-SMD_4P-L5.0-W5.0-TL 3328.71,12920.14 r90 top
LED104 "WS2812B" LED-SMD_4P-L5.0-W5.0-TL 3600.16,12920.14 r90 top
LED105 "WS2812B" LED-SMD_4P-L5.0-W5.0-TL 3871.61,12920.14 r90 top
LED106 "WS2812B" LED-SMD_4P-L5.0-W5.0-TL 4143.06,12920.14 r90 top
LED107 "WS2812B" LED-SMD_4P-L5.0-W5.0-TL 4414.52,12920.14 r90 top
LED108 "WS2812B" LED-SMD_4P-L5.0-W5.0-TL 4685.97,12920.14 r90 top
LED109 "WS2812B" LED-SMD_4P-L5.0-W5.0-TL 4957.42,12920.14 r90 top
LED110 "WS2812B" LED-SMD_4P-L5.0-W5.0-TL 5228.87,12920.14 r90 top
LED111 "WS2812B" LED-SMD_4P-L5.0-W5.0-TL 5500.32,12920.14 r90 top
LED112 "WS2812B" LED-SMD_4P-L5.0-W5.0-TL 5771.77,12920.14 r90 top
LED113 "WS2812B" LED-SMD_4P-L5.0-W5.0-TL 6043.22,12920.14 r90 top
LED114 "WS2812B" LED-SMD_4P-L5.0-W5.0-TL 6314.68,12920.14 r90 top
LED115 "WS2812B" LED-SMD_4P-L5.0-W5.0-TL 6586.13,12920.14 r90 top
LED116 "WS2812B" LED-SMD_4P-L5.0-W5.0-TL 6857.58,12920.14 r90 top
LED117 "WS2812B" LED-SMD_4P-L5.0-W5.0-TL 7129.03,12920.14 r90 top
LED118 "WS2812B" LED-SMD_4P-L5.0-W5.0-TL 7400.48,12920.14 r90 top
LED119 "WS2812B" LED-SMD_4P-L5.0-W5.0-TL 7671.93,12920.14 r90 top
LED120 "WS2812B" LED-SMD_4P-L5.0-W5.0-TL 7943.38,12920.14 r90 top
LED121 "WS2812B" LED-SMD_4P-L5.0-W5.0-TL 8214.84,12920.14 r90 top
LED122 "WS2812B" LED-SMD_4P-L5.0-W5.0-TL 8486.29,12920.14 r90 top
LED123 "WS2812B" LED-SMD_4P-L5.0-W5.0-TL 8757.74,12920.14 r90 top
LED124 "WS2812B" LED-SMD_4P-L5.0-W5.0-TL 9029.19,12920.14 r90 top
LED125 "WS2812B" LED-SMD_4P-L5.0-W5.0-TL 9300.64,12920.14 r90 top
LED126 "WS2812B" LED-SMD_4P-L5.0-W5.0-TL 9572.09,12920.14 r90 top
LED127 "WS2812B" LED-SMD_4P-L5.0-W5.0-TL 9843.55,12920.14 r90 top
LED128 "WS2812B" LED-SMD_4P-L5.0-W5.0-TL 10115,12920.14 r90 top
LED129 "WS2812B" LED-SMD_4P-L5.0-W5.0-TL 10115,12640.82 r270 top
LED130 "WS2812B" LED-SMD_4P-L5.0-W5.0-TL 9843.55,12637.96 r270 top
LED131 "WS2812B" LED-SMD_4P-L5.0-W5.0-TL 9572.1,12640.11 r270 top
LED132 "WS2812B" LED-SMD_4P-L5.0-W5.0-TL 9300.65,12640.11 r270 top
LED133 "WS2812B" LED-SMD_4P-L5.0-W5.0-TL 9029.19,12640.11 r270 top
LED134 "WS2812B" LED-SMD_4P-L5.0-W5.0-TL 8757.74,12640.11 r270 top
LED135 "WS2812B" LED-SMD_4P-L5.0-W5.0-TL 8486.29,12640.11 r270 top
LED136 "WS2812B" LED-SMD_4P-L5.0-W5.0-TL 8214.84,12640.11 r270 top
LED137 "WS2812B" LED-SMD_4P-L5.0-W5.0-TL 7943.39,12640.11 r270 top
LED138 "WS2812B" LED-SMD_4P-L5.0-W5.0-TL 7671.94,12640.11 r270 top
LED139 "WS2812B" LED-SMD_4P-L5.0-W5.0-TL 7400.48,12640.11 r270 top
LED140 "WS2812B" LED-SMD_4P-L5.0-W5.0-TL 7129.03,12640.11 r270 top
LED141 "WS2812B" LED-SMD_4P-L5.0-W5.0-TL 6857.58,12640.11 r270 top
LED142 "WS2812B" LED-SMD_4P-L5.0-W5.0-TL 6586.13,12640.11 r270 top
LED143 "WS2812B" LED-SMD_4P-L5.0-W5.0-TL 6314.68,12640.11 r270 top
LED144 "WS2812B" LED-SMD_4P-L5.0-W5.0-TL 6043.23,12640.11 r270 top
LED145 "WS2812B" LED-SMD_4P-L5.0-W5.0-TL 5771.78,12640.11 r270 top
LED146 "WS2812B" LED-SMD_4P-L5.0-W5.0-TL 5500.32,12640.11 r270 top
LED147 "WS2812B" LED-SMD_4P-L5.0-W5.0-TL 5228.87,12640.11 r270 top
LED148 "WS2812B" LED-SMD_4P-L5.0-W5.0-TL 4957.42,12640.11 r270 top
LED149 "WS2812B" LED-SMD_4P-L5.0-W5.0-TL 4685.97,12640.11 r270 top
LED150 "WS2812B" LED-SMD_4P-L5.0-W5.0-TL 4414.52,12640.11 r270 top
LED151 "WS2812B" LED-SMD_4P-L5.0-W5.0-TL 4143.07,12640.11 r270 top
LED152 "WS2812B" LED-SMD_4P-L5.0-W5.0-TL 3871.62,12640.11 r270 top
LED153 "WS2812B" LED-SMD_4P-L5.0-W5.0-TL 3600.16,12640.11 r270 top
LED154 "WS2812B" LED-SMD_4P-L5.0-W5.0-TL 3328.71,12640.11 r270 top
LED155 "WS2812B" LED-SMD_4P-L5.0-W5.0-TL 3057.26,12640.11 r270 top
LED156 "WS2812B" LED-SMD_4P-L5.0-W5.0-TL 2785.81,12640.11 r270 top
LED157 "WS2812B" LED-SMD_4P-L5.0-W5.0-TL 2514.36,12640.11 r270 top
LED158 "WS2812B" LED-SMD_4P-L5.0-W5.0-TL 2242.91,12640.11 r270 top
LED159 "WS2812B" LED-SMD_4P-L5.0-W5.0-TL 1971.45,12640.11 r270 top
LED160 "WS2812B" LED-SMD_4P-L5.0-W5.0-TL 1700,12640.11 r270 top
LED161 "WS2812B" LED-SMD_4P-L5.0-W5.0-TL 1700.4,12363.08 r90 top
LED162 "WS2812B" LED-SMD_4P-L5.0-W5.0-TL 1971.85,12361.65 r90 top
LED163 "WS2812B" LED-SMD_4P-L5.0-W5.0-TL 2243.3,12360.22 r90 top
LED164 "WS2812B" LED-SMD_4P-L5.0-W5.0-TL 2514.76,12360.22 r90 top
LED165 "WS2812B" LED-SMD_4P-L5.0-W5.0-TL 2786.21,12360.22 r90 top
LED166 "WS2812B" LED-SMD_4P-L5.0-W5.0-TL 3057.66,12360.22 r90 top
LED167 "WS2812B" LED-SMD_4P-L5.0-W5.0-TL 3329.11,12360.22 r90 top
LED168 "WS2812B" LED-SMD_4P-L5.0-W5.0-TL 3600.56,12360.22 r90 top
LED169 "WS2812B" LED-SMD_4P-L5.0-W5.0-TL 3872.01,12360.22 r90 top
LED170 "WS2812B" LED-SMD_4P-L5.0-W5.0-TL 4143.47,12360.22 r90 top
LED171 "WS2812B" LED-SMD_4P-L5.0-W5.0-TL 4414.92,12360.22 r90 top
LED172 "WS2812B" LED-SMD_4P-L5.0-W5.0-TL 4686.37,12360.22 r90 top
LED173 "WS2812B" LED-SMD_4P-L5.0-W5.0-TL 4957.82,12360.22 r90 top
LED174 "WS2812B" LED-SMD_4P-L5.0-W5.0-TL 5229.27,12360.22 r90 top
LED175 "WS2812B" LED-SMD_4P-L5.0-W5.0-TL 5500.72,12360.22 r90 top
LED176 "WS2812B" LED-SMD_4P-L5.0-W5.0-TL 5772.17,12360.22 r90 top
LED177 "WS2812B" LED-SMD_4P-L5.0-W5.0-TL 6043.63,12360.22 r90 top
LED178 "WS2812B" LED-SMD_4P-L5.0-W5.0-TL 6315.08,12360.22 r90 top
LED179 "WS2812B" LED-SMD_4P-L5.0-W5.0-TL 6586.53,12360.22 r90 top
LED180 "WS2812B" LED-SMD_4P-L5.0-W5.0-TL 6857.98,12360.22 r90 top
LED181 "WS2812B" LED-SMD_4P-L5.0-W5.0-TL 7129.43,12360.22 r90 top
LED182 "WS2812B" LED-SMD_4P-L5.0-W5.0-TL 7400.88,12360.22 r90 top
LED183 "WS2812B" LED-SMD_4P-L5.0-W5.0-TL 7672.34,12360.22 r90 top
LED184 "WS2812B" LED-SMD_4P-L5.0-W5.0-TL 7943.79,12360.22 r90 top
LED185 "WS2812B" LED-SMD_4P-L5.0-W5.0-TL 8215.24,12360.22 r90 top
LED186 "WS2812B" LED-SMD_4P-L5.0-W5.0-TL 8486.69,12360.22 r90 top
LED187 "WS2812B" LED-SMD_4P-L5.0-W5.0-TL 8758.14,12360.22 r90 top
LED188 "WS2812B" LED-SMD_4P-L5.0-W5.0-TL 9029.59,12360.22 r90 top
LED189 "WS2812B" LED-SMD_4P-L5.0-W5.0-TL 9301.04,12360.22 r90 top
LED190 "WS2812B" LED-SMD_4P-L5.0-W5.0-TL 9572.5,12360.22 r90 top
LED191 "WS2812B" LED-SMD_4P-L5.0-W5.0-TL 9843.95,12360.22 r90 top
LED192 "WS2812B" LED-SMD_4P-L5.0-W5.0-TL 10115.4,12360.22 r90 top
LED193 "WS2812B" LED-SMD_4P-L5.0-W5.0-TL 10115,12085.29 r270 top
LED194 "WS2812B" LED-SMD_4P-L5.0-W5.0-TL 9843.55,12086 r270 top
LED195 "WS2812B" LED-SMD_4P-L5.0-W5.0-TL 9572.1,12086.71 r270 top
LED196 "WS2812B" LED-SMD_4P-L5.0-W5.0-TL 9300.65,12086.71 r270 top
LED197 "WS2812B" LED-SMD_4P-L5.0-W5.0-TL 9029.19,12086.71 r270 top
LED198 "WS2812B" LED-SMD_4P-L5.0-W5.0-TL 8757.74,12086.71 r270 top
LED199 "WS2812B" LED-SMD_4P-L5.0-W5.0-TL 8486.29,12086.71 r270 top
LED200 "WS2812B" LED-SMD_4P-L5.0-W5.0-TL 8214.84,12086.71 r270 top
LED201 "WS2812B" LED-SMD_4P-L5.0-W5.0-TL 7943.39,12086.71 r270 top
LED202 "WS2812B" LED-SMD_4P-L5.0-W5.0-TL 7671.94,12086.71 r270 top
LED203 "WS2812B" LED-SMD_4P-L5.0-W5.0-TL 7400.48,12086.71 r270 top
LED204 "WS2812B" LED-SMD_4P-L5.0-W5.0-TL 7129.03,12086.71 r270 top
LED205 "WS2812B" LED-SMD_4P-L5.0-W5.0-TL 6857.58,12086.71 r270 top
LED206 "WS2812B" LED-SMD_4P-L5.0-W5.0-TL 6586.13,12086.71 r270 top
LED207 "WS2812B" LED-SMD_4P-L5.0-W5.0-TL 6314.68,12086.71 r270 top
LED208 "WS2812B" LED-SMD_4P-L5.0-W5.0-TL 6043.23,12086.71 r270 top
LED209 "WS2812B" LED-SMD_4P-L5.0-W5.0-TL 5771.78,12086.71 r270 top
LED210 "WS2812B" LED-SMD_4P-L5.0-W5.0-TL 5500.32,12086.71 r270 top
LED211 "WS2812B" LED-SMD_4P-L5.0-W5.0-TL 5228.87,12086.71 r270 top
LED212 "WS2812B" LED-SMD_4P-L5.0-W5.0-TL 4957.42,12086.71 r270 top
LED213 "WS2812B" LED-SMD_4P-L5.0-W5.0-TL 4685.97,12086.71 r270 top
LED214 "WS2812B" LED-SMD_4P-L5.0-W5.0-TL 4414.52,12086.71 r270 top
LED215 "WS2812B" LED-SMD_4P-L5.0-W5.0-TL 4143.07,12086.71 r270 top
LED216 "WS2812B" LED-SMD_4P-L5.0-W5.0-TL 3871.62,12086.71 r270 top
LED217 "WS2812B" LED-SMD_4P-L5.0-W5.0-TL 3600.16,12086.71 r270 top
LED218 "WS2812B" LED-SMD_4P-L5.0-W5.0-TL 3328.71,12086.71 r270 top
LED219 "WS2812B" LED-SMD_4P-L5.0-W5.0-TL 3057.26,12086.71 r270 top
LED220 "WS2812B" LED-SMD_4P-L5.0-W5.0-TL 2785.81,12086.71 r270 top
LED221 "WS2812B" LED-SMD_4P-L5.0-W5.0-TL 2514.36,12086.71 r270 top
LED222 "WS2812B" LED-SMD_4P-L5.0-W5.0-TL 2242.91,12086.71 r270 top
LED223 "WS2812B" LED-SMD_4P-L5.0-W5.0-TL 1971.45,12086.71 r270 top
LED224 "WS2812B" LED-SMD_4P-L5.0-W5.0-TL 1700,12086.71 r270 top
LED225 "WS2812B" LED-SMD_4P-L5.0-W5.0-TL 1700,11815 r90 top
LED226 "WS2812B" LED-SMD_4P-L5.0-W5.0-TL 1971.45,11815 r90 top
LED227 "WS2812B" LED-SMD_4P-L5.0-W5.0-TL 2242.9,11815 r90 top
LED228 "WS2812B" LED-SMD_4P-L5.0-W5.0-TL 2514.35,11815 r90 top
LED229 "WS2812B" LED-SMD_4P-L5.0-W5.0-TL 2785.81,11815 r90 top
LED230 "WS2812B" LED-SMD_4P-L5.0-W5.0-TL 3057.26,11815 r90 top
LED231 "WS2812B" LED-SMD_4P-L5.0-W5.0-TL 3328.71,11815 r90 top
LED232 "WS2812B" LED-SMD_4P-L5.0-W5.0-TL 3599.05,11815.58 r90 top
LED233 "WS2812B" LED-SMD_4P-L5.0-W5.0-TL 3871.62,11816.58 r90 top
LED234 "WS2812B" LED-SMD_4P-L5.0-W5.0-TL 4143.05,11815.58 r90 top
LED235 "WS2812B" LED-SMD_4P-L5.0-W5.0-TL 4414.52,11815 r90 top
LED236 "WS2812B" LED-SMD_4P-L5.0-W5.0-TL 4685.97,11815 r90 top
LED237 "WS2812B" LED-SMD_4P-L5.0-W5.0-TL 4957.42,11815 r90 top
LED238 "WS2812B" LED-SMD_4P-L5.0-W5.0-TL 5228.87,11815 r90 top
LED239 "WS2812B" LED-SMD_4P-L5.0-W5.0-TL 5500.32,11815 r90 top
LED240 "WS2812B" LED-SMD_4P-L5.0-W5.0-TL 5771.77,11815 r90 top
LED241 "WS2812B" LED-SMD_4P-L5.0-W5.0-TL 6043.22,11815 r90 top
LED242 "WS2812B" LED-SMD_4P-L5.0-W5.0-TL 6314.68,11815 r90 top
LED243 "WS2812B" LED-SMD_4P-L5.0-W5.0-TL 6586.13,11815 r90 top
LED244 "WS2812B" LED-SMD_4P-L5.0-W5.0-TL 6857.58,11815 r90 top
LED245 "WS2812B" LED-SMD_4P-L5.0-W5.0-TL 7129.03,11815 r90 top
LED246 "WS2812B" LED-SMD_4P-L5.0-W5.0-TL 7400.48,11815 r90 top
LED247 "WS2812B" LED-SMD_4P-L5.0-W5.0-TL 7671.93,11815 r90 top
LED248 "WS2812B" LED-SMD_4P-L5.0-W5.0-TL 7943.38,11815 r90 top
LED249 "WS2812B" LED-SMD_4P-L5.0-W5.0-TL 8214.84,11815 r90 top
LED250 "WS2812B" LED-SMD_4P-L5.0-W5.0-TL 8486.29,11815 r90 top
LED251 "WS2812B" LED-SMD_4P-L5.0-W5.0-TL 8757.74,11815 r90 top
LED252 "WS2812B" LED-SMD_4P-L5.0-W5.0-TL 9029.19,11815 r90 top
LED253 "WS2812B" LED-SMD_4P-L5.0-W5.0-TL 9300.64,11815 r90 top
LED254 "WS2812B" LED-SMD_4P-L5.0-W5.0-TL 9572.09,11815 r90 top
LED255 "WS2812B" LED-SMD_4P-L5.0-W5.0-TL 9843.55,11815 r90 top
LED256 "WS2812B" LED-SMD_4P-L5.0-W5.0-TL 10115,11815 r90 top

## Footprints (in the part's own frame and the unit in brackets; to place one, negate y for a bottom-side part, rotate by r counter-clockwise, add the part's x,y. Pads: shape width x height; smd on the part's side, far side on the other; paste and mask are expansions set on the pad)
C0603 [mm]
  rect 0.8x0.9 smd: 1(-0.7,0) 2(0.7,0)
  silkscreen extent -1.41,-0.71 1.39,0.72
HDR-TH_4P-P2.54-V [mm]
  rect 1.7x1.7 hole 1.1: 1(-3.81,0)
  round 1.7 hole 1.1: 2(-1.27,0) 3(1.27,0) 4(3.81,0)
  silkscreen extent -5.08,-1.27 5.08,1.27
LED-SMD_4P-L5.0-W5.0-TL [mm]
  rect 1.5x1 smd: 1(-2.5,1.5) 2(-2.5,-1.5) 3(2.5,-1.5) 4(2.5,1.5)
  silkscreen extent -3,-2.5 2.5,2.5

## Free pads (board coordinates)
  round 196.85 hole 118.11: 2(1587,11518) 2(1587.01,14079) 2(10164,11518)

## Via types
v1: diameter 20, hole 15, Top Layer to Bottom Layer, 743 vias